# EAGLE board mapleCUx_med_019 (EAGLE 7.3.0)
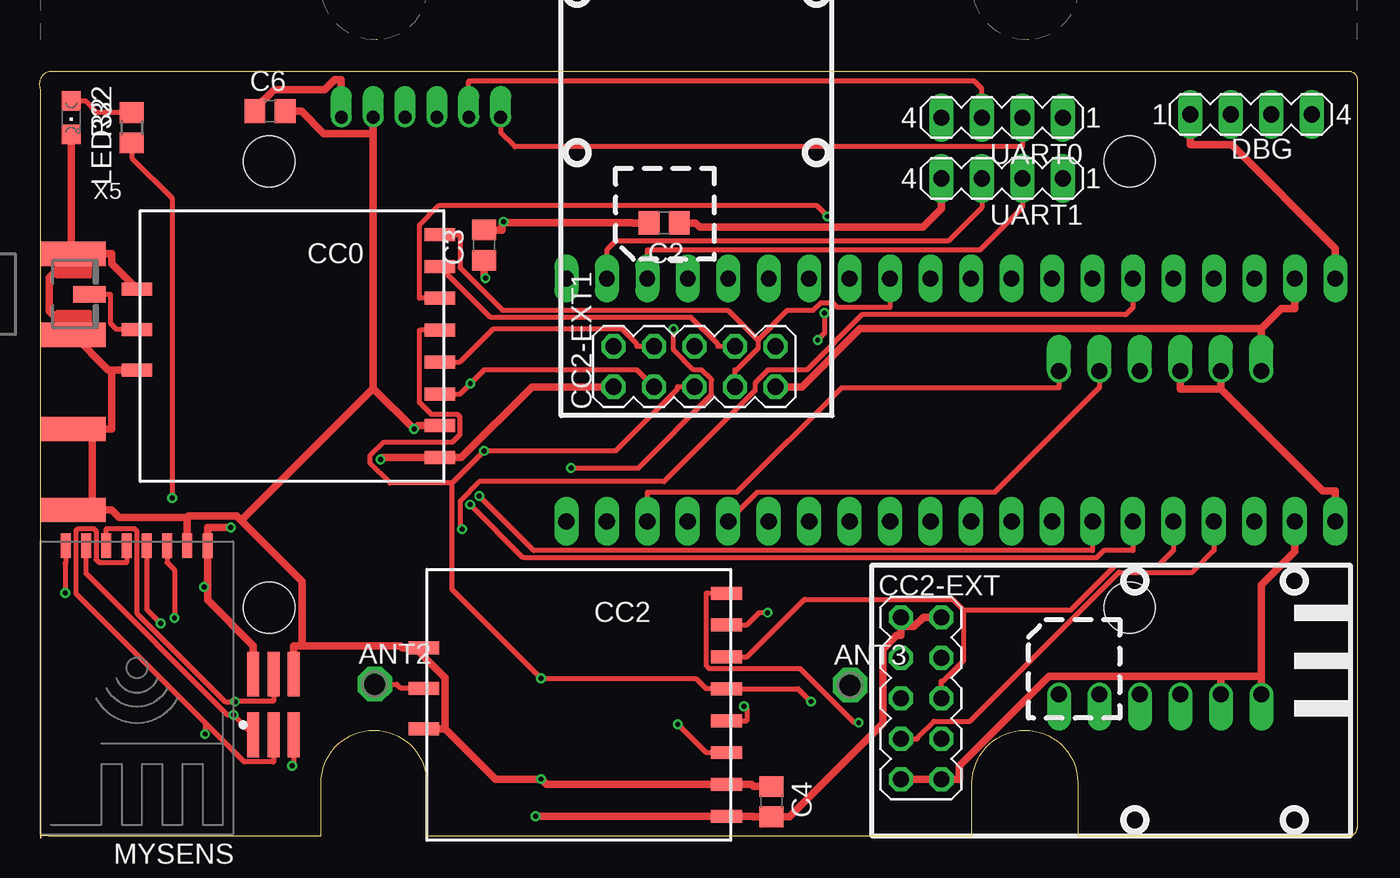
[diagram p0: board, top side]
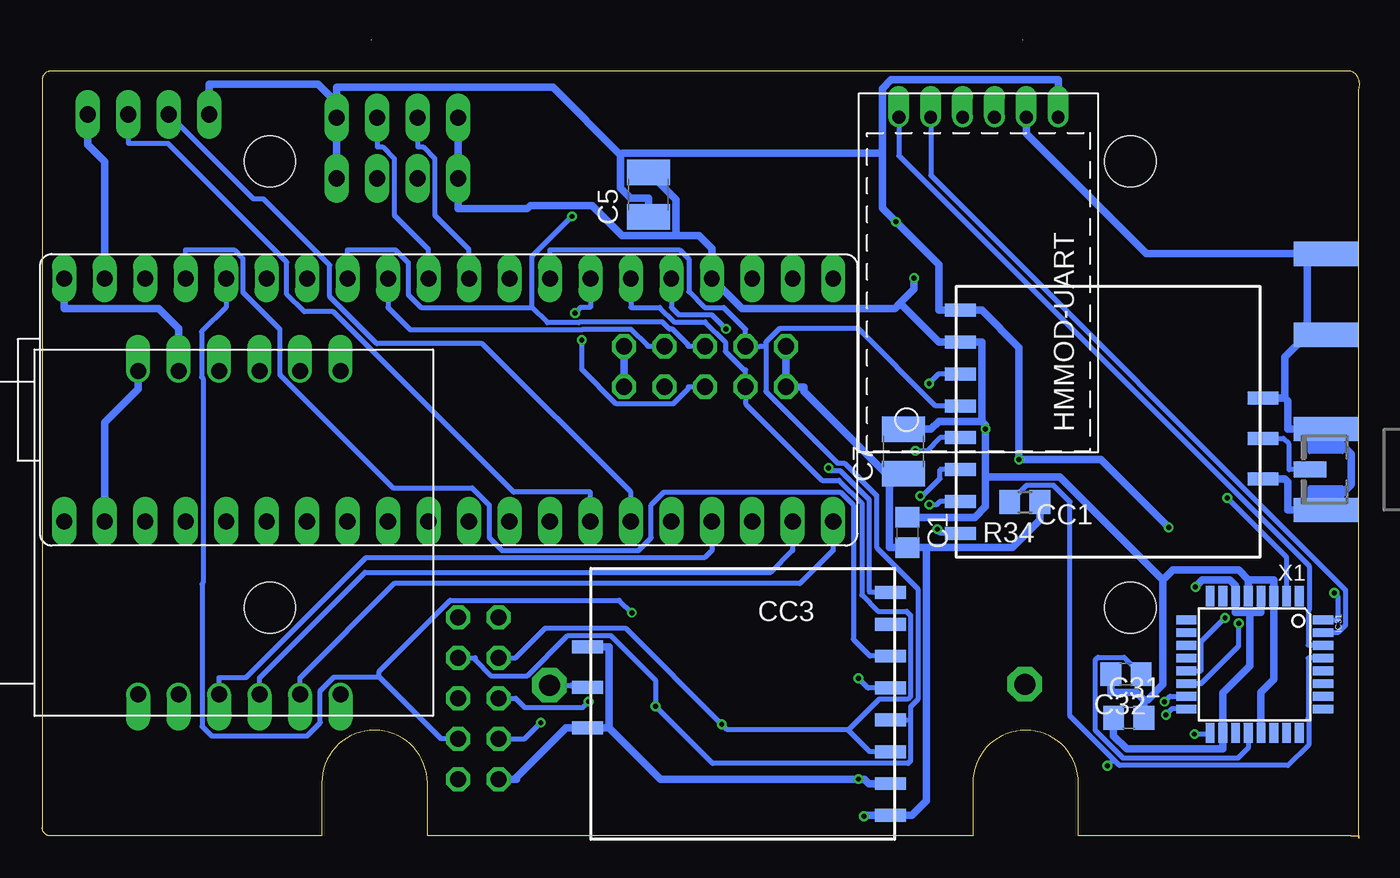
[diagram p1: board, bottom side, seen from below]

Size 82.66 x 50.1 mm. Coordinates in mm from the lower left corner, seen from the top.
Outline: 61.8,6.76 arc90 58.5,3.46 58.5,0.14 24.27,0.14 24.27,3.46 arc90 20.97,6.76 20.94,6.76 arc90 17.64,3.46 17.64,0.14 0.56,0.14 0.06,0.14 0.06,0 0.06,47 arc-90 0.56,48.13 82.16,48.13 arc-90 82.66,47.63 82.66,0.64 arc-90 82.16,0.14 65.13,0.14 65.13,3.46 arc90 61.83,6.76
Outline: 21.17,50.1 21.14,50.1
Outline: 62.03,50.1 62,50.1
Copper layers (1*16): Top 0.035mm / dielectric 1.5mm / Bottom 0.035mm
Design rules "SeeedStudio_2layer_DRU_no_angle_20140221": minimum track width 6mil, minimum drill 12mil, track to track 6mil, track to pad 6mil, pad to pad 6mil, via to via 6mil, smd to smd 0mil, copper to edge 10mil, drill to drill 10mil, minimum pad ring 10mil, minimum via ring 6mil, stop-mask expansion 2mil, vias tented up to drill 100mil, thermal gap 10mil
Net classes: 0 default: width 0.305 mm; 1 PWR: width 0.457 mm
Holes 3.2 mm at 14.39,14.46 14.39,42.46 68.39,42.46 68.39,14.46
tRestrict: area 17.3,-0.1 to 24.2,6.7; area 58.5,-0.1 to 65.3,6.7
bRestrict: area 17.3,-0.1 to 24.2,6.7; area 58.5,-0.1 to 65.3,6.7

## Footprints (pad centres in the part's own frame; a part is rotated, then mirrored left to right if it is on the bottom)
P1-13 = drill 1.321 pad 2.159 octagon: TP 0,0
C0805 = smd 1.3 x 1.5: 1 -0.95,0; 2 0.95,0
C1210 = smd 1.6 x 2.7: 1 -1.4,0; 2 1.4,0
CC1101_MODULE1_SMD = smd 1.93 x 0.813: ANT 19,5.96; CSN 0,0; GDO0 0,2; GDO2 0,4; GND@0 0,12; GND@1 19,8.5; GND@2 19,3.42; MISO 0,6; MOSI 0,10; SCLK 0,8; VCC 0,14
CC1101_MODULE3_DIL = drill 1.016 octagon: CSN 1.81,6.1; GDO0 4.35,6.1; GDO2 4.35,8.64; GND@0 1.81,3.56; GND@1 4.35,3.56; MISO 1.81,8.64; MOSI 1.81,11.18; SCK 4.35,11.18; VCC@0 1.81,13.72; VCC@1 4.35,13.72
MA04-1 = drill 1.016 long: 1 -3.81,0; 2 -1.27,0; 3 1.27,0; 4 3.81,0
HM-MOD-UART-DIL = drill 0.8 offset: 1 0,12; 2 0,10; 3 0,8; 4 0,6; 5 0,4; 6 0,2
USR-ES1 = drill 1 pad 1.35 offset: 1 -10.16,5.715; 2 -10.16,3.175; 3 -10.16,0.635; 4 -10.16,-1.905; 5 -10.16,-4.445; 6 -10.16,-6.985; 7 10.16,-6.985; 8 10.16,-4.445; 9 10.16,-1.905; 10 10.16,0.635; 11 10.16,3.175; 12 10.16,5.715
TQFP32-08 = smd 1.27 x 0.559: 1 -4.293,2.8; 2 -4.293,2; 3 -4.293,1.2; 4 -4.293,0.4; 5 -4.293,-0.4; 6 -4.293,-1.2; 7 -4.293,-2; 8 -4.293,-2.8; 17 4.293,-2.8; 18 4.293,-2; 19 4.293,-1.2; 20 4.293,-0.4; 21 4.293,0.4; 22 4.293,1.2; 23 4.293,2; 24 4.293,2.8 | smd 0.559 x 1.27: 9 -2.8,-4.293; 10 -2,-4.293; 11 -1.2,-4.293; 12 -0.4,-4.293; 13 0.4,-4.293; 14 1.2,-4.293; 15 2,-4.293; 16 2.8,-4.293; 25 2.8,4.293; 26 2,4.293; 27 1.2,4.293; 28 0.4,4.293; 29 -0.4,4.293; 30 -1.2,4.293; 31 -2,4.293; 32 -2.8,4.293
CHIPLED_0805 = smd 1.2 x 1.2: A 0,-1.05; C 0,1.05
NRF24L01+SMD = smd 0.635 x 1.524: CE -1.575,-7.861; CSN -0.305,-7.861; GND -2.845,-7.861; IRQ 4.775,-7.861; MISO 3.505,-7.861; MOSI 2.235,-7.861; SCK 0.965,-7.861; VCC -4.115,-7.861
R0805 = smd 1.3 x 1.5: 1 -0.95,0; 2 0.95,0
20-DIP = drill 1.016 pad 1.27 long: 1 -24.13,-7.62; 2 -21.59,-7.62; 3 -19.05,-7.62; 4 -16.51,-7.62; 5 -13.97,-7.62; 6 -11.43,-7.62; 7 -8.89,-7.62; 8 -6.35,-7.62; 9 -3.81,-7.62; 10 -1.27,-7.62; 11 1.27,-7.62; 12 3.81,-7.62; 13 6.35,-7.62; 14 8.89,-7.62; 15 11.43,-7.62; 16 13.97,-7.62; 17 16.51,-7.62; 18 19.05,-7.62; 19 21.59,-7.62; 20 24.13,-7.62 | drill 1 pad 1.27 long: 21 24.13,7.62; 22 21.59,7.62; 23 19.05,7.62; 24 16.51,7.62; 25 13.97,7.62; 26 11.43,7.62; 27 8.89,7.62; 28 6.35,7.62; 29 3.81,7.62; 30 1.27,7.62; 31 -1.27,7.62; 32 -3.81,7.62; 33 -6.35,7.62; 34 -8.89,7.62; 35 -11.43,7.62; 36 -13.97,7.62; 37 -16.51,7.62; 38 -19.05,7.62; 39 -21.59,7.62; 40 -24.13,7.62
SMA_EDGELAUNCH_UFL = smd 4.064 x 1.524: GND@1 2.032,-2.54; GND@2 2.032,2.54 | smd 4.064 x 1.524 bottom: GND@3 2.032,2.54; GND@4 2.032,-2.54 | smd 2.032 x 1.016: P 3.048,0
2X03-1.27MM_SMD = smd 0.75 x 2.8: P$1 -1.27,-1.905; P$2 -1.27,1.905; P$3 0,-1.905; P$4 0,1.905; P$5 1.27,-1.905; P$6 1.27,1.905

## Placement (x,y rotation side)
ANT2  TPPAD1-13  [P1-13]  21.01,9.66 0 top
ANT3  TPPAD1-13  [P1-13]  50.84,9.6 0 top
C1  22pF  [C0805]  28.38,19.19 270 bottom
C2  22pF  [C0805]  39.18,38.62 180 top
C3  22pF  [C0805]  27.87,37.22 90 top
C4  22pF  [C0805]  45.91,2.29 270 top
C5  10uF  [C1210]  44.64,40.39 90 bottom
C6  22pF  [C0805]  14.44,45.62 0 top
C7  4,7uF  [C1210]  28.63,24.27 90 bottom
C31  100n  [C0805]  14.49,7.55 0 bottom
C32  100n  [C0805]  14.66,10.29 180 bottom
CC0  CC1101  [CC1101_MODULE1_SMD]  25.09,37.88 180 top
CC1  CC1101_MODULE1SMD  [CC1101_MODULE1_SMD]  25.06,19.14 0 bottom
CC2  CC1101_MODULE1SMD  [CC1101_MODULE1_SMD]  43.09,15.37 180 top
CC2-EXT  CC1101_MODULE3_DIL  [CC1101_MODULE3_DIL]  52.22,0.14 0 top
CC2-EXT1  CC1101_MODULE3_DIL  [CC1101_MODULE3_DIL]  49.72,26.52 90 top
CC3  CC1101_MODULE1SMD  [CC1101_MODULE1_SMD]  29.45,15.42 180 bottom
DBG  [MA04-1]  76,45.42 0 top
HMMOD-UART  HM-MOD-UARTDIL  [HM-MOD-UART-DIL]  30.92,45.25 270 bottom
IC2  LAN-USR-ES1  [USR-ES1]  70.94,19.17 90 bottom
IC31  ATMEGA168-TQFP  [TQFP32-08]  6.59,10.9 270 bottom
LED32  [CHIPLED_0805]  1.96,45.22 180 top
MYSENS  NRF24L01+SMD  [NRF24L01+SMD]  6.41,10.49 180 top
R32  1k  [R0805]  5.77,44.59 90 top
R34  [R0805]  21.01,21.09 180 bottom
U$4  MAPLEMINI  [20-DIP]  57.17,27.51 0 bottom
UART0  [MA04-1]  60.38,45.22 180 top
UART1  [MA04-1]  60.38,41.41 180 top
X1  [SMA_EDGELAUNCH_UFL]  0.06,23.14 180 bottom
X5  [SMA_EDGELAUNCH_UFL]  0.06,34.13 0 top
X31  M03X2  [2X03-1.27MM_SMD]  14.66,8.39 0 top

## Library data of the parts
ANT2 ANT3 = testpad
C1-C7 C31 C32 R32 R34 = rcl
CC0 CC1 CC2 CC2-EXT CC2-EXT1 CC3 HMMOD-UART MYSENS = wireless
DBG UART0 UART1 = con-lstb; OC_FARNELL: unknown; OC_NEWARK: unknown
IC2 = Martin-Communication
IC31 = atmel
LED32 = led
U$4 = maplemini-mall
X1 X5 = adafruit
X31 = mechanics

## Nets
+5V: U$4.21
CC_CS0: CC0.CSN CC2-EXT1.CSN U$4.29
CC_CS1: CC1.CSN U$4.35
CC_CS2: CC2-EXT.CSN CC2.CSN U$4.4
CC_CS3: CC3.CSN U$4.25
CC_IN_0: CC0.GDO2 CC2-EXT1.GDO2 U$4.33
CC_IN_1: CC1.GDO2 U$4.7
CC_IN_2: CC2-EXT.GDO2 CC2.GDO2 U$4.5
CC_IN_3: CC3.GDO2 U$4.37
CC_OUT_0: CC0.GDO0 CC2-EXT1.GDO0 U$4.32
CC_OUT_1: CC1.GDO0 U$4.6
CC_OUT_2: CC2-EXT.GDO0 CC2.GDO0 U$4.36
CE-A: IC31.13 MYSENS.CE
CSN-A: IC31.14 MYSENS.CSN
GND [PWR]: C1.1 C2.1 C3.1 C4.1 C5.2 C6.2 C7.2 C31.2 C32.2 CC0.GND@0 CC0.GND@1 CC0.GND@2 CC1.GND@0 CC1.GND@1 CC1.GND@2 CC2-EXT1.GND@0 CC2-EXT1.GND@1 CC2-EXT.GND@0 CC2-EXT.GND@1 CC2.GND@0 CC2.GND@1 CC2.GND@2 CC3.GND@0 CC3.GND@1 CC3.GND@2 DBG.4 HMMOD-UART.2 IC2.1 IC2.2 IC2.12 IC31.3 IC31.5 IC31.21 LED32.C MYSENS.GND U$4.2 U$4.24 U$4.39 UART0.4 UART1.4 X1.GND@1 X1.GND@2 X1.GND@3 X1.GND@4 X5.GND@1 X5.GND@2 X5.GND@3 X5.GND@4 X31.P$6
IRQ-A: IC31.32 MYSENS.IRQ
M-RES: IC31.29 R34.2 X31.P$5
M-SCK: IC31.17 MYSENS.SCK X31.P$3
MISO1: CC0.MISO CC1.MISO CC2-EXT1.MISO CC2-EXT.MISO CC2.MISO CC3.MISO U$4.27
MISO2: IC2.7 U$4.18
MISO-A: IC31.16 MYSENS.MISO X31.P$1
MOSI1: CC0.MOSI CC1.MOSI CC2-EXT1.MOSI CC2-EXT.MOSI CC2.MOSI CC3.MOSI U$4.26
MOSI-A: IC31.15 MYSENS.MOSI X31.P$4
N$1: CC1.ANT X1.P
N$2: ANT3.TP CC3.ANT
N$3: ANT2.TP CC2.ANT
N$4: CC0.ANT X5.P
N$5: LED32.A R32.2
N$15: C32.1 IC31.20
N$33: IC2.6
NRESET: U$4.34
RST: IC2.3 U$4.17
RX1: U$4.22 UART1.3
RX-MAPLE: HMMOD-UART.5 IC31.31 U$4.30 UART0.3
RX_DBG: DBG.3 U$4.14
RX_LED: IC31.2 R32.1
SCK1: CC0.SCLK CC1.SCLK CC2-EXT1.SCK CC2-EXT.SCK CC2.SCLK CC3.SCLK U$4.28
SCK2: IC2.4 U$4.19
SWCLK/TCK: U$4.10
SWDIO/TMS: U$4.11
SWO/TDO: U$4.8
TDI: U$4.9
TX1: U$4.23 UART1.2
TX-MAPLE: HMMOD-UART.6 IC31.30 U$4.31 UART0.2
TX_DBG: DBG.2 U$4.15
VCC [PWR]: C1.2 C2.2 C3.2 C4.2 C5.1 C6.1 C7.1 C31.1 CC0.VCC CC1.VCC CC2-EXT1.VCC@0 CC2-EXT1.VCC@1 CC2-EXT.VCC@0 CC2-EXT.VCC@1 CC2.VCC CC3.VCC DBG.1 HMMOD-UART.1 IC2.10 IC2.11 IC31.4 IC31.6 IC31.18 MYSENS.VCC R34.1 U$4.1 U$4.40 UART0.1 UART1.1 X31.P$2
WIZ_CS: IC2.5 U$4.20
WIZ_RST: IC2.8 U$4.16

## Tracks (layer width: path | path; a pad name or v marks a point on that pad's centre or on a via)
CC_CS0
  Top 0.305: 45.05,31.27 43.18,33.14 29.04,33.14 26.36,35.81 26.36,37.88 CC0.CSN | 45.05,31.27 45.05,30.71 43.73,29.39 43.62,29.39 CC2-EXT1.CSN | 45.05,31.27 46.9,33.11 48.52,33.11 49,33.59 49.78,33.59 50.06,33.31 53.36,33.31 U$4.29
CC_CS1  (via drill 0.3 pad 0.61)
  Top 0.305: v26.5,19.39 26.38,19.52 26.38,21.18 27.58,22.38 39.18,22.38 44.89,28.08 44.89,28.58 45.71,29.39 48.14,29.39 51.6,32.85 68.14,32.85 68.6,33.31 U$4.35
  Bottom 0.305: v26.5,19.39 26.5,19.31 26.33,19.14 CC1.CSN
CC_CS2  (via drill 0.3 pad 0.61)
  Top 0.305: CC2.CSN 41.82,15.37 41.82,10.83 42.02,10.63 47.72,10.63 51.1,7.25 v51.39,7.25 | CC2-EXT.CSN 55.1,6.23 55.1,6.34 56.1,7.34 58.38,7.34 67.72,16.68 72.31,16.68 73.68,18.06 U$4.4
  Bottom 0.305: CC2-EXT.CSN 52.4,6.23 v51.39,7.25
CC_CS3  (via drill 0.3 pad 0.61)
  Top 0.305: v33.33,23.23 37.55,23.23 42.16,27.83 42.16,28.77 41.53,29.39 41.03,29.39 39.77,30.65 v39.77,31.96
  Bottom 0.305: v39.77,31.96 40.66,32.85 42.74,32.85 43.2,33.31 U$4.25 | v33.33,23.23 33.17,23.08 32.61,23.08 30.78,21.25 30.78,15.48 30.72,15.42 CC3.CSN
CC_IN_0  (via drill 0.3 pad 0.61)
  Top 0.305: v49.42,39.02 48.73,39.72 25.06,39.72 23.82,38.49 23.82,33.88 CC0.GDO2
  Bottom 0.305: 51.92,33.3 51.92,36.53 v49.42,39.02 | 51.92,33.3 50.97,32.35 48.99,32.35 48.94,32.39 43.76,32.39 43.3,31.94 43.11,31.94 42.15,30.98 42.15,30.87 CC2-EXT1.GDO2 | 51.92,33.3 58.91,33.3 59.71,34.1 59.71,36.13 60.52,36.94 63.52,36.94 U$4.33
CC_IN_1  (via drill 0.3 pad 0.61)
  Top 0.305: U$4.7 66.06,18.06 30.99,18.06 v27.57,21.48
  Bottom 0.305: CC1.GDO2 26.33,23.14 26.33,22.57 27.43,21.48 v27.57,21.48
CC_IN_2
  Top 0.305: 57.97,14.31 64.7,14.31 67.53,17.14 70.22,17.14 71.14,18.06 U$4.5 | 57.97,14.31 57.29,14.99 47.98,14.99 44.36,11.37 CC2.GDO2 | CC2-EXT.GDO2 56.57,9.84 56.69,9.84 57.97,11.12 57.97,14.31
CC_IN_3
  Bottom 0.305: CC3.GDO2 30.72,11.42 31.77,12.48 31.77,20.91 32.58,21.72 43.66,21.72 44.47,20.91 44.47,18.85 45.26,18.06 53.82,18.06 54.63,18.86 54.63,20.91 55.69,21.98 60.65,21.98 67.76,29.09 67.76,31.95 70.08,34.26 70.08,36.38 70.63,36.94 73.68,36.94 U$4.37
CC_OUT_0
  Top 0.305: CC2-EXT1.GDO0 42.55,30.87 42.55,31 40.87,32.68 28.3,32.68 CC0.GDO0
  Bottom 0.305: CC2-EXT1.GDO0 44.69,30.87 44.69,30.91 45.71,31.94 48.76,31.94 48.8,31.89 59.56,31.89 60.98,33.31 U$4.32
CC_OUT_1  (via drill 0.3 pad 0.61)
  Top 0.305: U$4.6 68.6,18.06 66.77,18.06 66.31,17.6 30.33,17.6 v27,20.93
  Bottom 0.305: CC1.GDO0 26.33,21.14 26.53,20.93 v27,20.93
CC_OUT_2  (via drill 0.3 pad 0.61)
  Top 0.305: CC2.GDO0 44.36,13.37 45.14,14.14 v45.67,14.14
  Bottom 0.305: 61.53,10.12 57.64,6.23 CC2-EXT.GDO0 | 61.53,10.12 64.35,10.12 65.22,9.25 65.22,7.24 66.06,6.4 72.03,6.4 72.64,7.02 72.64,15.95 72.58,16.02 72.58,28.84 72.67,28.93 72.67,31.78 71.14,33.31 U$4.36 | 61.53,10.12 61.53,10.47 57.07,14.94 46.46,14.94 v45.67,14.14
CE-A  (via drill 0.3 pad 0.61)
  Top 0.305: v8.45,13.83 8.45,16.82 7.98,17.29 MYSENS.CE
  Bottom 0.305: v8.45,13.83 9.94,12.33 9.94,10.5 IC31.13
CSN-A  (via drill 0.3 pad 0.61)
  Top 0.305: MYSENS.CSN 6.71,14.35 v7.59,13.48
  Bottom 0.305: IC31.14 9.94,9.7 7.59,12.05 v7.59,13.48
GND  (via drill 0.3 pad 0.61)
  Top 0.457: 12.62,19.94 12.36,20.21 9.35,20.21 9.25,20.12 | 16.47,12.08 16.47,16.1 12.62,19.94 | 20.92,28.23 12.62,19.94 | 3.3,20.6 4.5,20.6 4.98,20.12 9.25,20.12 | X1.GND@2 3.3,20.6 | 3.3,25.68 4.5,25.68 4.5,29.39 | X1.GND@1 3.3,25.68 | 3.3,20.6 3.3,25.68 | 4.5,29.39 4.75,29.39 CC0.GND@1 | 4.5,29.39 4.3,29.39 X5.GND@1 0.59,33.09 0.59,35.18 X5.GND@2 | 9.25,20.12 9.25,19.5 MYSENS.GND | 20.92,28.23 v23.47,25.68 23.54,25.68 23.75,25.89 CC0.GND@0 | 20.92,44.22 20.92,28.23 | 20.92,44.22 17.82,44.22 16.42,45.62 C6.2 | 16.47,12.08 22.62,12.08 22.75,11.95 23.42,11.95 | 16.47,12.08 15.93,12.08 X31.P$6 | v27.96,35.15 27.87,35.24 C3.1 | 76.65,31.97 51.47,31.97 47.83,28.33 47.3,28.33 CC2-EXT1.GND@0 | C2.1 41.16,38.62 41.43,38.34 55.41,38.34 56.57,39.5 UART1.4 | HMMOD-UART.2 20.92,44.22 | U$4.2 78.76,17.98 76.65,15.88 76.65,10.14 | 74.11,10.14 76.65,10.14 | 74.11,10.14 63.31,10.14 57.72,4.55 57.72,3.7 CC2-EXT.GND@1 CC2-EXT.GND@0 | 74.11,10.14 74.11,9.99 IC2.2 | 25.44,6.87 28.61,3.7 v31.45,3.7 31.78,3.37 CC2.GND@0 44.65,3.37 44.78,3.24 C4.1 | CC2.GND@1 25.44,6.87 | 23.42,11.95 23.55,11.95 25.44,10.06 25.44,6.87 | CC2.GND@2 23.42,11.95 | CC0.GND@2 4.5,36.05 4.5,36.67 X5.GND@2 | LED32.C 1.96,36.8 X5.GND@2 | U$4.39 78.76,33.24 77.92,33.24 76.65,31.97 | IC2.12 76.65,31.97 | IC2.1 76.65,10.14
  Bottom 0.457: 12.34,16.21 11.73,16.82 7.6,16.82 6.99,16.21 | 12.34,16.21 18.81,22.68 23.47,22.68 | 13.54,8.68 13.31,8.68 12.34,9.65 12.34,16.21 | C32.2 15.61,9.16 14.03,9.16 13.54,8.68 | C31.2 13.54,8.68 | 6.99,16.21 5.39,16.21 IC31.3 5.39,9.96 6.19,9.16 IC31.21 | 23.47,22.68 v23.47,25.68 23.47,25.93 23.71,26.16 | C1.1 24.15,20.14 23.47,20.81 23.47,22.68 | IC31.5 6.99,16.21 | 4.71,27.64 4.5,27.43 4.5,25.68 X1.GND@1 0.52,24.11 0.52,22.18 2.11,20.6 2.32,20.6 | 3.3,36.67 13.37,36.67 20.92,44.22 HMMOD-UART.2 | 3.3,36.67 X5.GND@2 | 3.3,31.6 3.3,36.67 | CC1.GND@1 4.71,27.64 | 3.3,31.6 4.71,30.18 4.71,27.64 | 3.3,31.6 X5.GND@1 | 28.84,33.57 29.18,33.23 38.77,33.23 U$4.24 40.66,37.01 41.46,37.81 42.9,37.81 | 28.84,33.57 26.41,31.14 CC1.GND@0 23.71,31.14 23.71,26.16 | 28.84,33.57 27.96,34.45 v27.96,35.15 | 42.9,37.81 42.9,40.06 C5.2 | 42.9,37.81 | 42.9,37.81 46.28,37.81 48.18,39.71 52.02,39.71 52.23,39.5 56.57,39.5 UART1.4 UART0.4 | 47.1,6.92 43.88,3.7 v31.45,3.7 31.07,3.7 30.79,3.42 CC3.GND@0 | DBG.4 79.81,43.52 78.76,42.46 U$4.39 | 23.71,26.16 26.4,26.16 26.9,25.67 C7.2 | IC2.12 76.65,28.2 78.76,26.09 U$4.2 | CC3.GND@2 47.1,12 47.1,6.92 | 47.1,6.92 47.25,6.92 CC3.GND@1 49.79,6.92 52.89,3.83 52.89,3.7 CC2-EXT.GND@0 | 2.32,20.6 4.5,20.6 4.5,22.35 4.71,22.56 CC1.GND@2 | X1.GND@2 2.32,20.6 | CC2-EXT1.GND@1 CC2-EXT1.GND@0
IRQ-A  (via drill 0.3 pad 0.61)
  Top 0.305: MYSENS.IRQ 1.63,17.29 1.59,17.25 v1.59,15.4
  Bottom 0.305: IC31.32 1.36,13.7 1.36,15.16 v1.59,15.4
M-RES  (via drill 0.3 pad 0.61)
  Top 0.305: v15.83,4.53 15.93,4.63 15.93,4.78 X31.P$5
  Bottom 0.305: 15.44,4.93 18.18,7.67 18.18,21.1 19.22,22.15 20.91,22.15 R34.2 | 15.44,4.93 15.07,4.55 4.48,4.55 3.21,5.83 3.21,7.52 3.24,7.55 3.24,11.3 IC31.29 | 15.44,4.93 v15.83,4.53
M-SCK  (via drill 0.3 pad 0.61)
  Top 0.305: 10.36,7.25 2.28,15.33 2.28,19.3 2.41,19.42 3.39,19.42 3.53,19.28 3.53,17.49 3.73,17.29 5.44,17.29 MYSENS.SCK | 10.36,7.25 v10.36,6.53 | 10.36,7.25 12.83,4.78 14.66,4.78 X31.P$3
  Bottom 0.305: v10.36,6.53 9.47,6.53 IC31.17
MISO1  (via drill 0.3 pad 0.61)
  Top 0.305: 25.86,22.29 v27.88,24.31 36.13,24.31 40.01,28.19 40.01,28.33 CC2-EXT1.MISO | 25.86,22.29 25.86,15.61 v31.45,10.03 41.17,10.03 41.82,9.37 CC2.MISO 47.58,9.37 v48.39,8.57 | 25.86,22.29 21.97,22.29 20.74,23.51 20.74,24.04 21.56,24.85 25.89,24.85 26.36,25.33 26.36,26.44 26.21,26.6 24.57,26.6 23.82,27.34 23.82,31.89 CC0.MISO | v49.24,32.96 49.24,31.69 v48.81,31.26
  Bottom 0.305: v48.39,8.57 48.75,8.2 52.4,8.2 52.97,8.78 CC2-EXT.MISO | U$4.27 48.28,33.31 48.89,33.31 v49.24,32.96 | CC2-EXT1.MISO 42.15,28.33 42.15,28.19 43.08,27.25 46.66,27.25 48.81,29.41 v48.81,31.26 | CC1.MISO 26.33,25.14 27.16,24.31 v27.88,24.31 | CC3.MISO 30.85,9.42 v31.45,10.03
MISO2
  Top 0.305: IC2.7 63.95,28.27 50.32,28.27 43.76,21.71 38.12,21.71 U$4.18
MISO-A  (via drill 0.3 pad 0.61)
  Top 0.305: MYSENS.MISO 2.9,16.6 11.77,7.73 v12.15,7.73 v12.15,7.72 X31.P$1
  Bottom 0.305: IC31.16 11.82,8.1 11.82,8.07 v12.15,7.73
MOSI1  (via drill 0.3 pad 0.61)
  Top 0.305: CC2-EXT1.MOSI 37.47,29.39 27.87,29.39 v27.02,28.54 26.36,27.89 CC0.MOSI | v40.03,7.14 41.81,5.37 CC2.MOSI
  Bottom 0.305: 32.07,6.8 39.69,6.8 v40.03,7.14 46.07,13.18 51.1,13.18 52.97,11.31 CC2-EXT.MOSI | U$4.26 45.74,33.31 43.92,33.31 43.01,32.4 41.07,32.4 39.81,31.14 39.81,30.55 38.65,29.39 38.54,29.39 CC2-EXT1.MOSI 38.54,27.26 33.74,22.46 32.67,22.46 31.24,21.03 31.24,15.26 30.22,14.24 28.43,14.24 28.18,13.99 28.18,8.89 28.36,8.71 30.16,8.71 32.07,6.8 | CC1.MOSI 26.42,29.14 v27.02,28.54 | 32.07,6.8 32.07,6.78 30.72,5.42 CC3.MOSI
MOSI-A  (via drill 0.3 pad 0.61)
  Top 0.305: MYSENS.MOSI 4.17,19.42 5.93,19.42 6.08,19.27 6.08,14.12 11.64,8.56 v12.25,8.56 12.28,8.59 14.66,8.59 X31.P$4
  Bottom 0.305: v12.25,8.56 11.91,8.9 IC31.15
N$1
  Bottom 0.305: CC1.ANT 4.79,25.1 4.43,24.73 4.43,23.14 X1.P
N$2
  Bottom 0.305: ANT3.TP 49.46,9.6 49.32,9.46 CC3.ANT
N$3
  Top 0.305: ANT2.TP 22.4,9.66 22.65,9.41 CC2.ANT
N$4
  Top 0.305: CC0.ANT 4.82,31.93 4.43,32.32 4.43,34.13 X5.P
N$5
  Top 0.305: LED32.A 2.87,46.27 3.6,45.53 R32.2
N$15
  Bottom 0.305: IC31.20 6.99,5.67 7.64,5.01 14.84,5.01 16.59,6.77 16.59,11.17 16.42,11.35 14.77,11.35 C32.1
RST
  Bottom 0.305: IC2.3 71.57,10.07 69.9,10.07 62.37,17.6 41.11,17.6 40.66,18.06 U$4.17
RX1
  Top 0.305: U$4.22 35.58,36.94 36.12,37.48 57.01,37.48 59.11,39.58 UART1.3
RX-MAPLE
  Top 0.305: HMMOD-UART.5 26.92,47.52 58.64,47.52 59.11,47.05 UART0.3
  Bottom 0.305: U$4.30 55.9,36.94 58.05,39.09 58.05,42.66 58.78,43.39 59.11,43.39 UART0.3 | HMMOD-UART.5 26.92,44.29 26.92,41.6 0.9,15.58 0.9,13.36 1.36,12.9 IC31.31
RX_DBG
  Bottom 0.305: U$4.14 48.28,21.71 53.08,21.71 64.4,33.03 66.23,33.03 67.33,34.13 67.33,36.15 74.77,43.6 77.27,43.6 DBG.3
RX_LED  (via drill 0.3 pad 0.61)
  Top 0.305: R32.1 5.77,42.68 8.3,40.15 v8.3,21.36
  Bottom 0.305: v8.3,21.36 4.59,17.64 IC31.2
SCK1  (via drill 0.3 pad 0.61)
  Top 0.305: CC0.SCLK 26.36,29.89 28.43,31.95 36.52,31.95 37.47,31 37.47,30.87 CC2-EXT1.SCK | CC2.SCLK 44.36,7.37 44.36,8.1 v44.19,8.28
  Bottom 0.305: 37.27,30.87 37.27,28.03 32.77,23.53 32.34,23.53 30.32,21.52 30.32,18.25 27.72,15.65 27.72,8.7 28.18,8.24 | 28.18,8.24 | 28.18,8.24 28.18,7.42 | 28.18,7.42 28.18,4.85 28.34,4.69 40.6,4.69 v44.19,8.28 44.19,9.91 46.99,12.72 49.71,12.72 52.23,10.2 54.52,10.2 55.51,11.18 55.51,11.31 CC2-EXT.SCK | 37.27,30.87 37.27,31.12 36.42,31.97 31.46,31.97 26.62,27.14 26.33,27.14 CC1.SCLK | 37.27,30.87 37.62,30.87 38.01,30.87 CC2-EXT1.SCK 38.54,31.93 39.92,33.31 41.11,33.31 42.09,34.29 42.09,36.34 42.69,36.94 50.82,36.94 U$4.28 | CC3.SCLK 28.18,7.42
SCK2
  Bottom 0.305: IC2.4 69.03,10.07 62.42,16.68 36.95,16.68 35.58,18.06 U$4.19
TX1
  Top 0.305: U$4.23 38.12,36.94 59.01,36.94 61.65,39.58 UART1.2
TX-MAPLE
  Top 0.305: HMMOD-UART.6 28.92,44.29 29.82,43.39 61.65,43.39 UART0.2
  Bottom 0.305: 28.92,42.83 28.92,44.29 HMMOD-UART.6 | 28.92,42.83 | 28.92,42.83 3.17,17.08 3.17,14.32 3.24,14.25 3.24,12.1 IC31.30 | U$4.31 58.44,36.94 60.59,39.09 60.59,42.66 61.32,43.39 61.65,43.39 UART0.2
TX_DBG
  Bottom 0.305: U$4.15 45.74,21.71 55.06,31.04 61.68,31.04 64.63,33.98 64.63,35.96 68.78,40.11 69.42,40.11 DBG.2
VCC  (via drill 0.3 pad 0.61)
  Top 0.457: v11.98,19.5 10.52,19.5 MYSENS.VCC 10.52,15.76 | 10.52,15.76 v10.3,15.76 | 10.52,15.76 10.52,14.95 13.39,12.08 X31.P$2 | U$4.1 81.3,21.79 80.52,21.79 74.11,28.2 | CC2-EXT1.VCC@0 30.88,28.33 26.44,23.89 CC0.VCC 23.75,23.89 21.5,23.89 v21.38,23.76 | DBG.1 72.19,43.52 74.79,43.52 81.3,37.01 U$4.40 | 29.1,38.64 37.17,38.64 37.19,38.62 C2.2 | 29.1,38.64 29,38.54 29,38.17 C3.2 | v29.1,38.69 29.1,38.64 | CC2-EXT.VCC@1 55.43,13.86 54.86,13.28 54.03,13.28 | 54.03,13.28 54.03,12.71 53.75,12.71 52.89,11.86 52.89,7.2 47.04,1.34 C4.2 44.78,1.34 44.75,1.37 CC2.VCC v31.1,1.37 | CC2-EXT.VCC@0 54.03,13.28 | HMMOD-UART.1 18.92,47.59 18.49,47.59 17.88,46.99 | 17.88,46.99 14.69,46.99 13.49,45.79 C6.1 | 17.88,46.99 | IC2.10 71.57,28.2 74.11,28.2 | IC2.11 74.11,28.2
  Bottom 0.457: v11.98,19.5 16.24,23.76 v21.38,23.76 21.38,30.8 23.71,33.13 CC1.VCC 26.41,33.13 26.41,35.99 v29.1,38.69 29.96,39.55 29.96,42.99 | v10.3,15.76 9.86,16.21 8.15,16.21 7.79,15.85 IC31.6 7.79,14.69 7.79,14.18 6.9,14.18 | 6.9,14.18 6.19,14.18 IC31.4 | 6.9,14.18 6.9,10.8 8.59,9.11 IC31.18 8.59,5.59 14.62,5.59 15.44,6.42 C31.1 | IC2.11 74.11,31.97 75.38,33.24 81.3,33.24 U$4.40 | 29.7,22.87 34.86,28.02 34.86,28.33 CC2-EXT1.VCC@0 CC2-EXT1.VCC@1 | 27.19,18.24 21.79,18.24 20.06,19.96 R34.1 | 27.19,18.24 C1.2 29.51,18.24 29.51,22.67 29.7,22.87 | 27.19,18.24 27.19,2.34 28.1,1.42 CC3.VCC 30.79,1.42 31.05,1.42 v31.1,1.37 | C7.1 29.7,22.87 | DBG.1 72.19,47.33 65.35,47.33 64.19,46.17 | 64.19,46.17 64.19,47.12 50.63,47.12 46.37,42.86 | 64.19,46.17 UART0.1 UART1.1 | 46.37,42.86 46.37,40.8 45.74,40.17 44.64,40.17 C5.1 | 29.96,42.99 46.25,42.99 46.37,42.86 | 29.96,42.99 29.96,47.05 29.41,47.59 18.92,47.59 HMMOD-UART.1
WIZ_CS
  Bottom 0.305: IC2.5 66.49,10.07 60.59,15.97 35.12,15.97 33.04,18.06 U$4.20
WIZ_RST
  Top 0.305: IC2.8 66.49,28.27 59.94,21.71 45.03,21.71 U$4.16